# Altium PCB Altium.pcbdoc
Units mm, origin at the board's own origin, x right, y up, seen from the top; angles counter-clockwise.
Board outline 103.68 x 65.66 mm, 2 copper layers (Top Layer, Bottom Layer); 66 components, 46 nets, 313 pads, 155 vias.
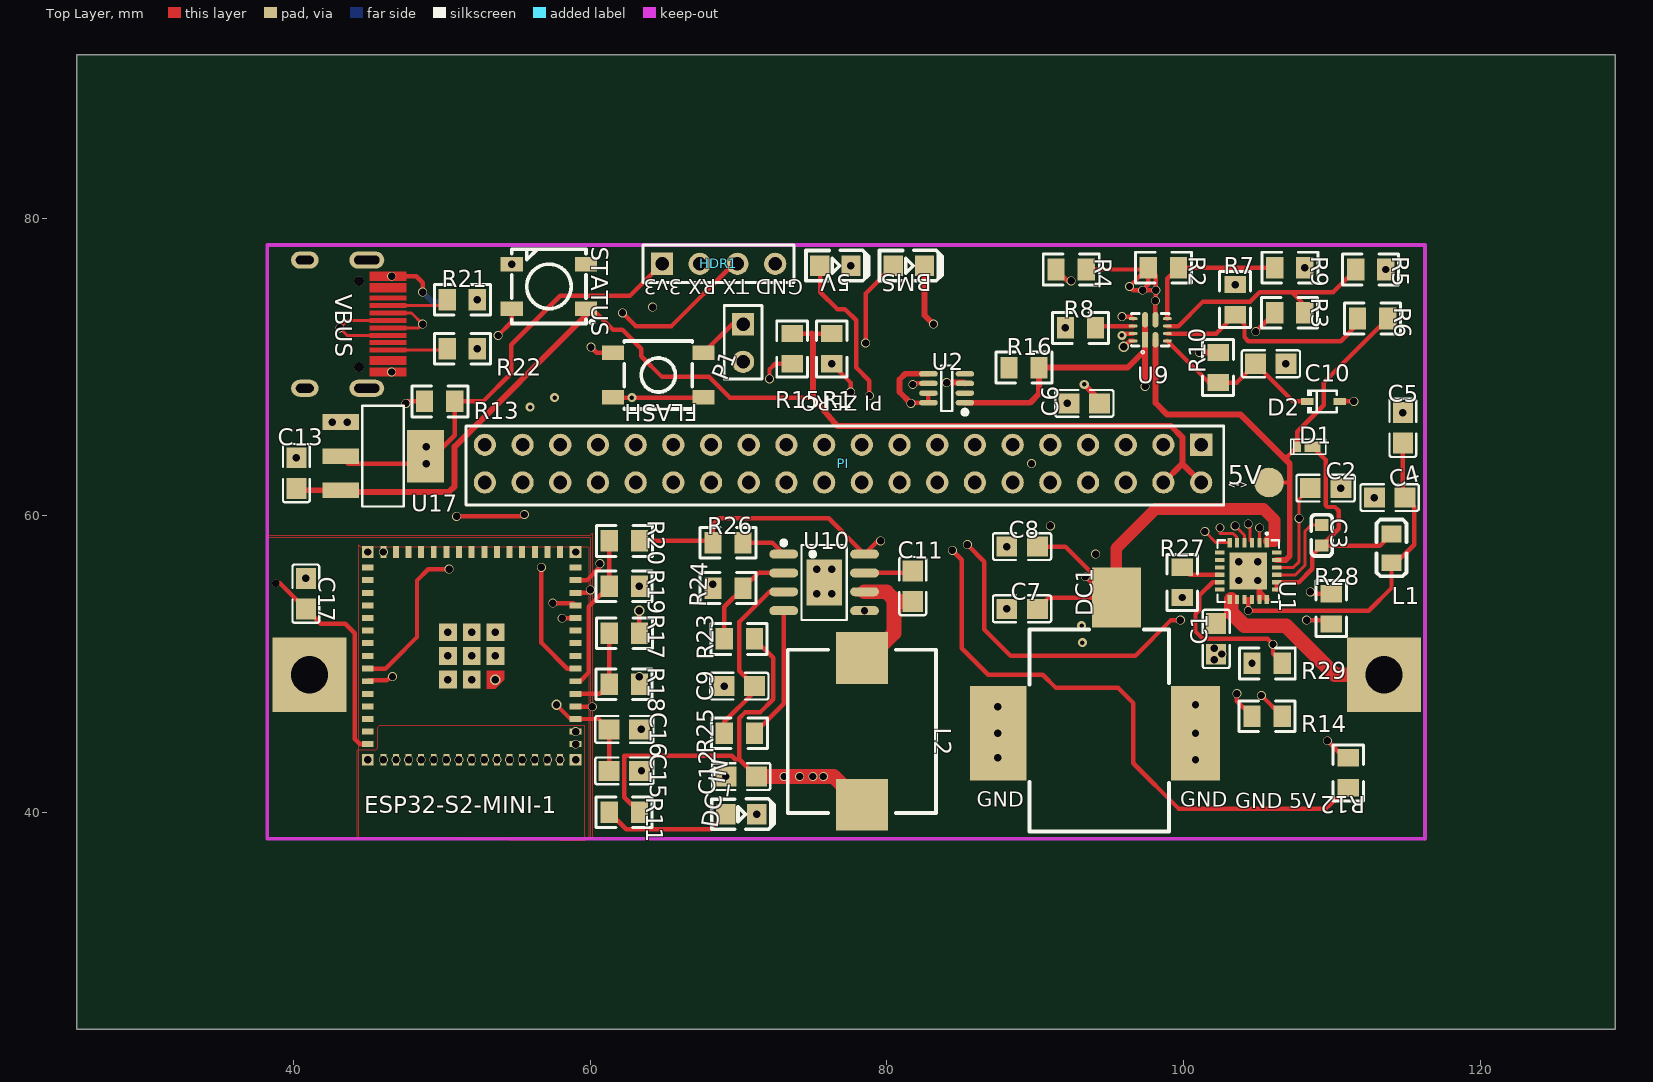
[diagram p0: Top Layer view]
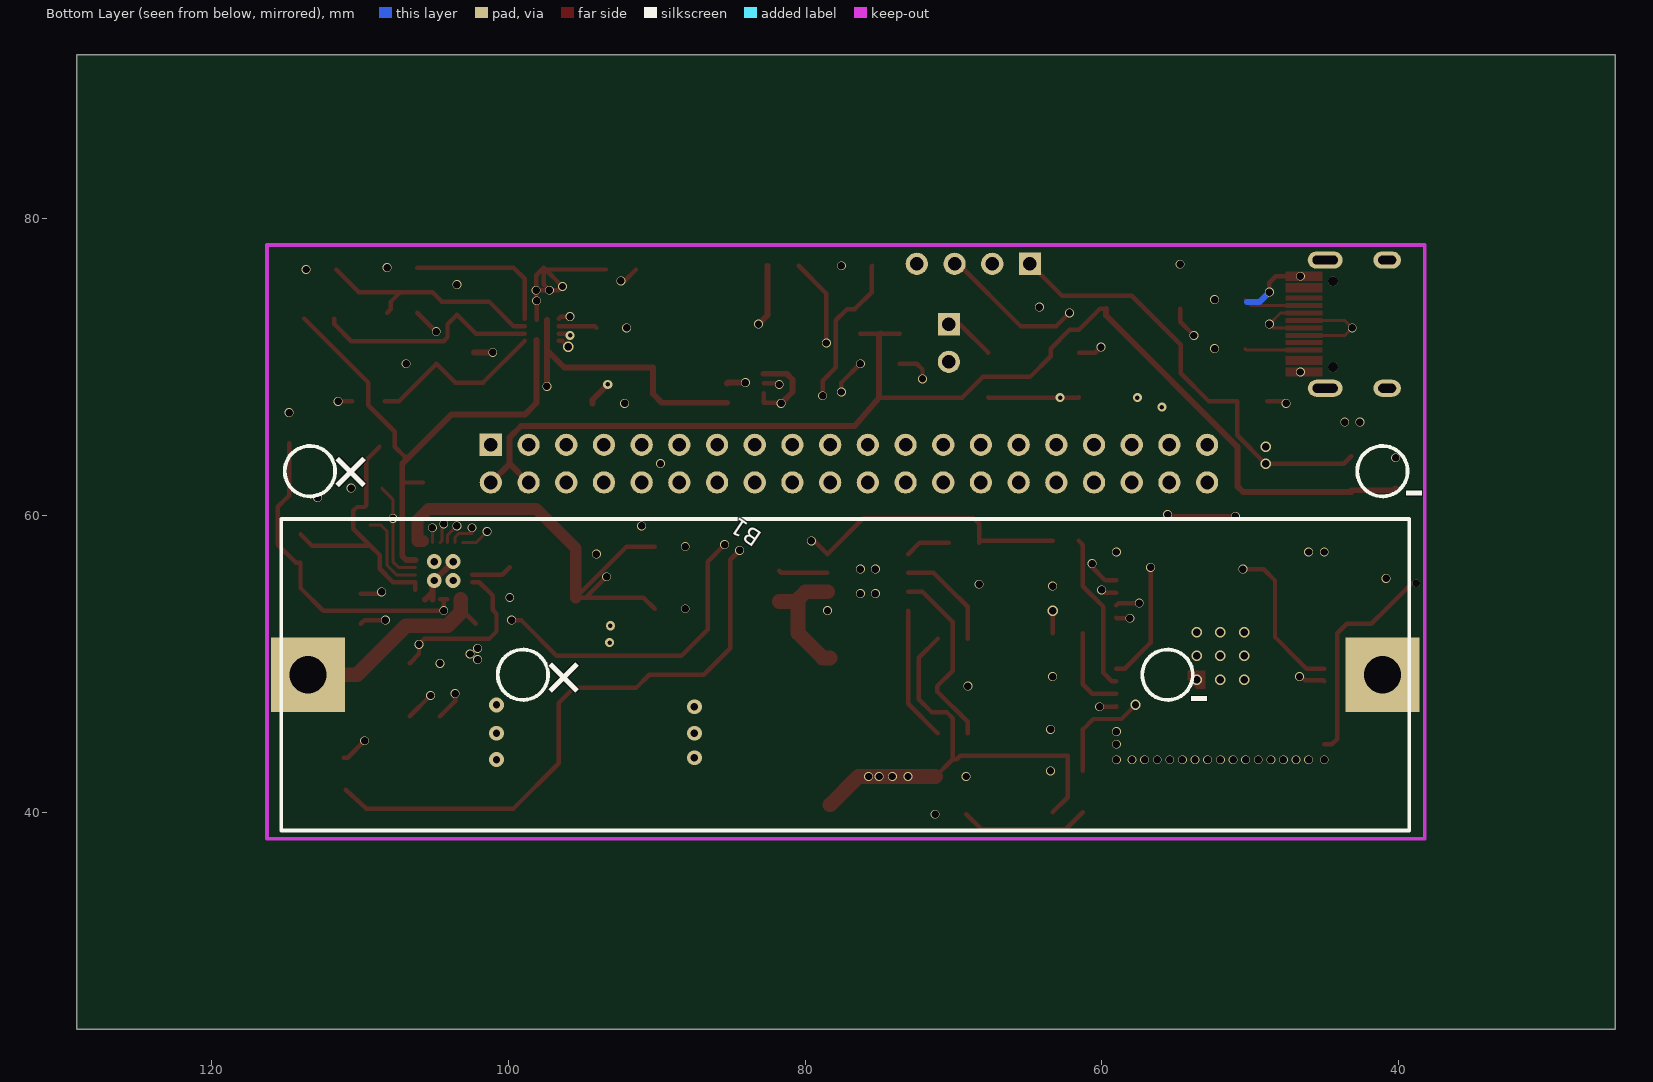
[diagram p1: Bottom Layer view, seen from below]

## Layer stack, top to bottom
Top Layer: signal copper (thickness not stored)
Dielectric: dielectric 0.32, FR-4, Dk 4.8
Bottom Layer: signal copper (thickness not stored)

## Board outline
129.078,25.4 25.4,25.4 25.4,91.059 129.078,91.059

## Components (designator, comment, footprint, x,y, rotation, side; value= is the part's Value field where it differs from the comment)
5V "5V" LED-SMD_0805-R-RD 76.529,76.835 r180 top
B1 "18650" 18650-BATT-HLDR 80.085,49.276 r270 bottom
BMS "BMS_STATUS" LED-SMD_0805-R-RD 81.482,76.835 r180 top
C1 "10uF" C0805 102.183,51.689 r90 top
C2 "4.7uF" C0805 109.549,61.849 r0 top
C3 "47nF" C0603 109.295,58.674 r90 top
C4 "10uF" C0805 113.867,61.214 r0 top
C5 "10uF" C0805 114.756,65.913 r270 top
C6 "1uF" C0805 93.293,67.564 r180 top
C7 "10uF" C0805 89.102,53.721 r0 top
C8 "10uF" C0805 89.102,57.912 r0 top
C9 "0.47uF" C0805 70.052,48.514 r0 top
C10 "0.1uF" C0805 105.866,70.231 r180 top
C11 "0.47uF" C0805 81.736,55.245 r270 top
C12 "10uF" C0805 70.179,42.418 r0 top
C13 "1uF" C0805 40.207,62.865 r90 top
C15 "22uF" C0805 62.305,42.799 r0 top
C16 "0.1uF" C0805 62.305,45.593 r0 top
C17 "0.1uF" C0805 40.842,54.737 r90 top
D1 "NSR10F20NXT5G" DSN2_L1.6-W0.8-RD 108.152,64.643 r0 top
D2 "BZT52B3V0S" SOD-323_L1.8-W1.3-LS2.5-RD 109.422,67.691 r0 top
DC1 "DC" RASM712BKZ 94.69,45.339 r0 top
DC_IN "DC_IN" LED-SMD_0805-R-RD 70.18,39.878 r180 top
ESP32-S2-MINI-1 "ESP32-S2-MINI-1" ESP32-S2-MINI-1 52.018,50.546 r180 top
FLASH "PTS647SM70SMTR2LFS" KEY-SMD_4P-L4.5-W4.5-P3.00-LS6.5-TL 64.591,69.469 r180 top
HDR1 "UART" HDR1X4 68.655,76.962 r0 top
L1 "2.2uH" L0805 113.994,57.785 r270 top
L2 "1.5uH" IND-SMD_L11.0-W10.0 78.307,45.466 r270 top
P1 "HDR1X2" HDR1X2 70.179,73.025 r270 top
PI "Raspberry PI ZERO W" PI-ZERO-HDR 77.291,63.246 r180 top
R1 "10k" 0805 76.275,71.247 r90 top
R2 "10.2k" 0805 98.627,76.708 r180 top
R3 "23.7k" 0805 107.136,73.66 r0 top
R4 "1M" 0805 92.404,76.581 r180 top
R5 "5k" 0805 112.597,76.581 r0 top
R6 "23.7k" 0805 112.724,73.279 r0 top
R7 "5k" 0805 103.453,74.549 r270 top
R8 "18k" 0805 93.039,72.644 r180 top
R9 "5k" 0805 107.136,76.708 r180 top
R10 "20k" 0805 102.31,69.977 r90 top
R11 "1k" 0805 62.305,40.005 r0 top
R12 "1k" 0805 111.073,42.672 r90 top
R13 "10k" 0805 49.859,67.691 r180 top
R14 "1k" 0805 105.612,46.482 r0 top
R15 "10k" 0805 73.608,71.247 r90 top
R16 "0.010" 0805 89.229,69.977 r0 top
R17 "10k" 0805 62.305,52.07 r180 top
R18 "10k" 0805 62.305,48.641 r0 top
R19 "10k" 0805 62.305,55.245 r0 top
R20 "10k" 0805 62.305,58.293 r180 top
R21 "5.1k" 0805 51.383,74.549 r180 top
R22 "5.1k" 0805 51.383,71.247 r180 top
R23 "22k" 0805 70.052,51.689 r0 top
R24 "3k" 0805 69.29,55.118 r180 top
R25 "100k" 0805 70.052,45.339 r180 top
R26 "10k" 0805 69.29,58.166 r180 top
R27 "260" 0805 99.897,55.499 r90 top
R28 "10k" 0805 109.93,53.721 r270 top
R29 "10k" 0805 105.612,50.038 r180 top
STATUS "WS2812B" LED-SMD_4P-L5.0-W5.0-TL 57.225,75.438 r180 top
U1 "BQ25895RTWR" QFN-24_L4.0-W4.0-P0.50-TL-EP2.7 104.342,56.261 r270 top
U2 "INA219AIDCNR" SOT-23-8_L3.0-W1.7-P0.65-LS2.8-BR 84.022,68.58 r0 top
U9 "TPS2121RUXR" VQFN-HR-12_L2.5-W2.0-P0.50-BL 97.738,72.517 r0 top
U10 "TPS56528DDAR" SOIC-8_L4.9-W3.9-P1.27-LS6.0-BL-EP 75.767,55.499 r270 top
U17 "AMS1117-3.3_C165482" SOT-223_L6.5-W3.5-P2.30-LS7.0-BR 46.049,64.008 r180 top
VBUS "USB-C" HRO-TYPE-C-31-M-12-HANDSOLDERING 38.175,72.898 r270 top

## Footprints (in the part's own frame and the unit in brackets; to place one, negate y for a bottom-side part, rotate by r counter-clockwise, add the part's x,y. Pads: shape width x height; smd on the part's side, far side on the other; paste and mask are expansions set on the pad)
0805 [mm]
  rect 1.16x1.45 smd: 1(-1.016,0) 2(1.016,0)
  silkscreen extent -1.9,-1.03 1.87,1.04
18650-BATT-HLDR [mm]
  rect 5x5 hole 2.5: +(0,-33.401) -(0,38.989)
  silkscreen extent -10.5,-35.21 10.5,40.79
C0603 [mm]
  rect 0.8x0.9 smd: 1(-0.7,0) 2(0.7,0)
  silkscreen extent -1.41,-0.71 1.39,0.72
C0805 [mm]
  rect 1.41x1.35 smd: 1(-1.03,0) 2(1.03,0)
  silkscreen extent -1.96,-0.9 1.96,0.9
DSN2_L1.6-W0.8-RD [mm]
  rect 0.52x0.7 smd: 1(-0.517,0)
  rect 1.05x0.7 smd: 2(0.517,0)
  silkscreen extent -0.93,-0.51 1.41,0.51
ESP32-S2-MINI-1 [mm]
  rect 0.8x0.4 smd: 3(-7,4.252) 4(-7,3.404) 5(-7,2.556) 6(-7,1.708) 7(-7,0.86) 8(-7,0) 9(-7,-0.86) 10(-7,-1.708) 11(-7,-2.556) 12(-7,-3.404) 13(-7,-4.252) 14(-7,-5.1) 15(-7,-5.95) 31(7,-5.95) 32(7,-5.1) 33(7,-4.252) 34(7,-3.404) 35(7,-2.556) 36(7,-1.708) 37(7,-0.86) 38(7,0) 39(7,0.86) 40(7,1.708) 41(7,2.556) 42(7,3.404) 43(7,4.252) 44(7,5.1) 45(7,5.95) GND(-7,5.95) GND(-7,5.1)
  rect 0.4x0.8 smd: 16(-5.95,-7) 17(-5.1,-7) 18(-4.252,-7) 19(-3.404,-7) 20(-2.556,-7) 21(-1.708,-7) 22(-0.86,-7) 23(0,-7) 24(0.86,-7) 25(1.708,-7) 26(2.556,-7) 27(3.404,-7) 28(4.252,-7) 29(5.1,-7) GND(-5.95,7) GND(-5.1,7) GND(-4.252,7) GND(-3.404,7) GND(-2.556,7) GND(-1.708,7) GND(-0.86,7) GND(0,7) GND(0.86,7) GND(1.708,7) GND(2.556,7) GND(3.404,7) GND(4.252,7) GND(5.1,7) GND(5.95,7) GND(5.95,-7)
  rect 0.8x0.8 smd: GND(-7,7) GND(-7,-7) GND(7,-7) GND(7,7)
  round 0 smd: GND(-1.6,1.6)
  rect 1.2x1.2 smd: GND(-1.6,0) GND(-1.6,-1.6) GND(0,1.6) GND(0,0) GND(0,-1.6) GND(1.6,1.6) GND(1.6,0) GND(1.6,-1.6)
  Top Layer region: -1,1 -2.2,1 -2.2,1.6 -1.6,2.2 -1,2.2
HDR1X2 [mil]
  rect 59x59 hole 36: 1(5,5)
  round 59 hole 36: 2(105,5)
  silkscreen extent -45,-45 150,55
HDR1X4 [mil]
  rect 59x59 hole 36: 1(-150,0)
  round 59 hole 36: 2(-50,0) 3(50,0) 4(150,0)
  silkscreen extent -200,-50 200,50
HRO-TYPE-C-31-M-12-HANDSOLDERING [mm]
  round 0 smd: A1B12(-3.225,8.195) A4B9(-2.45,8.195) A5(-1.25,8.195) A6(-0.25,8.195) A7(0.25,8.195) A8(1.25,8.195) B1A12(3.225,8.195) B4A9(2.45,8.195) B5(1.75,8.195) B6(0.75,8.195) B7(-0.75,8.195) B8(-1.75,8.195)
  oval 1.15x2.35 hole 0.6 slot 1.7 at 90 deg: SHELL(-4.32,6.78) SHELL(4.32,6.78)
  oval 1.15x1.85 hole 0.6 slot 1.2 at 90 deg: SHELL(-4.32,2.6) SHELL(4.32,2.6)
  round 0.65 hole 0.65 unplated: ""(-2.89,6.25) ""(2.89,6.25)
  Top Layer region: -0.4,9.42 -0.1,9.42 -0.1,6.97 -0.4,6.97
  Top Layer region: 0.1,9.42 0.4,9.42 0.4,6.97 0.1,6.97
  Top Layer region: 0.6,9.42 0.9,9.42 0.9,6.97 0.6,6.97
  Top Layer region: -0.9,9.42 -0.6,9.42 -0.6,6.97 -0.9,6.97
  Top Layer region: 1.1,9.42 1.4,9.42 1.4,6.97 1.1,6.97
  Top Layer region: -1.4,9.42 -1.1,9.42 -1.1,6.97 -1.4,6.97
  Top Layer region: 1.6,9.42 1.9,9.42 1.9,6.97 1.6,6.97
  Top Layer region: -1.9,9.42 -1.6,9.42 -1.6,6.97 -1.9,6.97
  Top Layer region: -2.75,9.42 -2.15,9.42 -2.15,6.97 -2.75,6.97
  Top Layer region: 2.15,9.42 2.75,9.42 2.75,6.97 2.15,6.97
  Top Layer region: -3.525,9.42 -2.925,9.42 -2.925,6.97 -3.525,6.97
  Top Layer region: 2.925,9.42 3.525,9.42 3.525,6.97 2.925,6.97
IND-SMD_L11.0-W10.0 [mm]
  rect 3.5x3.5 smd: 1(-4.95,0) 2(4.95,0)
  silkscreen extent -5.5,-5 5.5,5
KEY-SMD_4P-L4.5-W4.5-P3.00-LS6.5-TL [mm]
  rect 1.5x1 smd: 1(-3.05,1.5) 2(3.05,1.5) 3(-3.05,-1.5) 4(3.05,-1.5)
  silkscreen extent -2.29,-2.29 2.29,2.29
L0805 [mm]
  rect 1.133x1.377 smd: 1(-0.966,0) 2(0.966,0)
  silkscreen extent -1.95,-1.02 1.86,1.02
LED-SMD_4P-L5.0-W5.0-TL [mm]
  rect 1.5x1 smd: 1(-2.5,1.5) 2(-2.5,-1.5) 3(2.5,-1.5) 4(2.5,1.5)
  silkscreen extent -3,-2.5 2.5,2.5
LED-SMD_0805-R-RD [mm]
  rect 1.3x1.4 smd: 1(1.05,0) 2(-1.05,0)
  silkscreen extent -2.22,-1.04 1.99,1.01
PI-ZERO-HDR [mil]
  rect 59x59 hole 36: 1(-940,-60)
  round 59 hole 36: 2(-940,40) 3(-840,-60) 4(-840,40) 5(-740,-60) 6(-740,40) 7(-640,-60) 8(-640,40) 9(-540,-60) 10(-540,40) 11(-440,-60) 12(-440,40) 13(-340,-60) 14(-340,40) 15(-240,-60) 16(-240,40) 17(-140,-60) 18(-140,40) 19(-40,-60) 20(-40,40) 21(60,-60) 22(60,40) 23(160,-60) 24(160,40) 25(260,-60) 26(260,40) 27(360,-60) 28(360,40) 29(460,-60) 30(460,40) 31(560,-60) 32(560,40) 33(660,-60) 34(660,40) 35(760,-60) 36(760,40) 37(860,-60) 38(860,40) 39(960,-60) 40(960,40)
  silkscreen extent -1000,-110 1010,100
QFN-24_L4.0-W4.0-P0.50-TL-EP2.7 [mm]
  rect 0.633x0.28 smd: 1(-1.912,1.25) 2(-1.912,0.75) 3(-1.912,0.25) 4(-1.912,-0.25) 5(-1.912,-0.75) 6(-1.912,-1.25) 13(1.912,-1.25) 14(1.912,-0.75) 15(1.912,-0.25) 16(1.912,0.25) 17(1.912,0.75) 18(1.912,1.25)
  rect 0.28x0.633 smd: 7(-1.25,-1.912) 8(-0.75,-1.912) 9(-0.25,-1.912) 10(0.25,-1.912) 11(0.75,-1.912) 12(1.25,-1.912) 19(1.25,1.912) 20(0.75,1.912) 21(0.25,1.912) 22(-0.25,1.912) 23(-0.75,1.912) 24(-1.25,1.912)
  rect 2.5x2.5 smd: 25(0,0)
  silkscreen extent -2.6,-2.08 2.08,2.08
RASM712BKZ [mm]
  rect 3.3x4.06 smd: 1(0.76,9.14)
  rect 3.3x6.35 smd: 2(6.1,0)
  rect 3.81x6.35 smd: 3(-7.19,0)
  silkscreen extent -5.08,-6.63 4.32,6.98
SOD-323_L1.8-W1.3-LS2.5-RD [mm]
  rect 0.845x0.455 smd: 1(-1.098,0) 2(1.098,0)
  silkscreen extent -1.1,-0.8 0.88,0.8
SOIC-8_L4.9-W3.9-P1.27-LS6.0-BL-EP [mm]
  oval 0.602x1.941 smd: 1(-1.905,-2.72) 2(-0.635,-2.72) 3(0.635,-2.72) 4(1.905,-2.72) 5(1.905,2.72) 6(0.635,2.72) 7(-0.635,2.72) 8(-1.905,2.72)
  rect 3.098x2.41 smd: 9(0,0)
  silkscreen extent -2.81,-2.87 2.53,1.52
SOT-23-8_L3.0-W1.7-P0.65-LS2.8-BR [mm]
  oval 1.252x0.364 smd: 1(1.226,-0.975) 2(1.226,-0.325) 3(1.226,0.325) 4(1.226,0.975) 5(-1.226,0.975) 6(-1.226,0.325) 7(-1.226,-0.325) 8(-1.226,-0.975)
  silkscreen extent -0.37,-1.76 1.38,1.53
SOT-223_L6.5-W3.5-P2.30-LS7.0-BR [mm]
  rect 2.465x1.05 smd: 1(2.858,-2.3) 2(2.857,0) 3(2.857,2.3)
  rect 2.465x3.54 smd: 4(-2.857,0)
  silkscreen extent -1.4,-3.4 1.4,3.4
VQFN-HR-12_L2.5-W2.0-P0.50-BL [mm]
  rect 0.4x1.05 smd: 1(-0.35,-0.675)
  oval 0.4x1.05 smd: 2(0.35,-0.675) 7(0.35,0.675) 8(-0.35,0.675)
  oval 0.6x0.2 smd: 3(1.15,-0.75) 4(1.15,-0.25) 5(1.15,0.25) 6(1.15,0.75) 9(-1.15,0.75) 10(-1.15,0.25) 11(-1.15,-0.25) 12(-1.15,-0.75)
  silkscreen extent -1.25,-1.6 1.25,1.1

## Free pads (board coordinates)
  round 2 smd: 1(105.739,62.23)

## Via types
v1: diameter 0.6, hole 0.5, Top Layer to Bottom Layer, 123 vias
v2: diameter 0.7, hole 0.5, Top Layer to Bottom Layer, 14 vias
v3: diameter 1, hole 0.5, Top Layer to Bottom Layer, 10 vias
v4: diameter 0.61, hole 0.305, Top Layer to Bottom Layer, 7 vias
v5: diameter 0.5, hole 0.5, Top Layer to Bottom Layer, 1 vias

## Nets (pads, with @x,y where several pads share a name; then routed paths per layer and width w, separated by ;. In a path a pad name is that pad's centre, name@x,y a point inside that pad or via, vN(x,y) a via of type N, cw(c..) or ccw(c..) an arc to the next point about the centre after c; other vN are vias at no path point)
3V: C10.2 D2.1 R10.1 U9.3 | length 12.2
  Top Layer w0.3: U9.3 101.694,68.961 R10.1 103.566,68.961 C10.2 107.376,67.691 D2.1
3V3: C15.1 C16.1 ESP32-S2-MINI-1.3 HDR1.1 R13.1 U17.2 U17.4 | length 59.2
  Top Layer w0.3: U17.2 43.7,63.5 v2(48.97,63.5) 50.875,65.405 R13.1 52.78,67.691 54.685,69.596 54.685,71.501 57.987,74.803 62.686,74.803 HDR1.1 ; v2(57.733,47.244) 58.683,46.294 ESP32-S2-MINI-1.3 60.574,46.294 C16.1 C15.1
  Mid-Layer 1 w0.3: v2(48.97,63.5) v2(48.97,64.643)
  Mid-Layer 2 w0.3: v2(48.97,63.5) 55.574,56.896 55.574,47.244 v2(57.733,47.244)
+5V: C13.1 PI.2 PI.4 R1.2 R12.2 R15.2 R16.1 STATUS.1 U2.2 U2.4 U17.3 | length 109.9
  Top Layer w0.3: STATUS.1 60.121,73.937 61.543,72.517 62.178,72.517 63.448,71.247 63.448,70.739 64.845,69.342 68.02,69.342 69.417,67.945 75.005,67.945 ; R15.2 R1.2 ; v1(109.676,44.831) 110.819,43.688 R12.2
  Top Layer w0.4: C13.1 40.334,61.708 U17.3 ; U17.3@43.192,61.709 43.192,61.595 50.494,61.595 50.875,61.976 50.875,64.643 59.724,73.492 STATUS.1 ; 74.928,72.263 75.005,72.186 75.005,67.945 ; 75.005,68.58 75.005,67.945 ; 86.943,66.04 87.959,66.04 99.135,66.04 99.897,65.278 99.897,63.5 ; 87.756,66.04 87.324,66.04 86.933,66.04 81.863,66.04 76.656,66.04 75.005,67.945 ; PI.4 99.897,63.5 ; PI.2 99.897,63.5
  Mid-Layer 1 w0.3: PI.2 103.072,60.325 105.485,60.325 106.501,59.309 106.501,54.102 107.009,53.594 107.263,53.594 108.914,53.594 108.914,51.689 109.676,50.927 v1(109.676,44.831)
BAT_VSENSE: B1.+ C1.2 R17.1 U1.13 U1.14 | length 79.7
  Top Layer w0.3: R17.1 v2(63.321,53.594) ; C1.2 103.199,53.735 U1.13@103.199,54.356
  Top Layer w1: U1.13@103.199,54.356 103.199,53.467 104.088,52.578 106.882,52.578 110.184,49.276 B1.+
  Mid-Layer 1 w0.3: v2(63.321,53.594) 66.369,50.546 66.369,47.498 72.211,41.656 105.231,41.656 111.2,41.656 112.089,42.545 112.089,44.577 113.486,45.974 B1.+
BAT_VSENSE_DIV: ESP32-S2-MINI-1.5 R17.2 R18.1 | length 6
  Top Layer w0.3: ESP32-S2-MINI-1.5 60.638,47.99 R18.1 R17.2
BMS_2: BMS.2 R14.1 | length 41.3
  Top Layer w0.3: v1(103.58,48.006) 103.58,47.498 R14.1
  Top Layer w0.4: BMS.2 82.532,73.499 v1(83.133,72.898)
  Mid-Layer 1 w0.4: v1(83.133,72.898) 83.133,72.39 89.737,65.786 v1(89.737,63.5) ; v1(91.007,59.309) 92.15,59.309 v1(94.055,57.404)
  Mid-Layer 2 w0.3: v1(94.055,57.404) 94.055,55.753 101.802,48.006 v1(103.58,48.006)
  Mid-Layer 2 w0.4: v1(89.737,63.5) 89.737,60.579 90.118,60.198 ; 90.118,60.325 90.118,60.198 ; v1(91.007,59.309) 90.118,60.198
BUCKOUT: C12.2 L2.2 R2.2 R3.1 R4.1 R11.2 R23.2 U9.7 | length 114.3
  Top Layer w0.3: R11.2 62.305,41.021 62.305,43.815 69.544,43.815 69.785,43.574 70.052,43.574 70.052,46.355 70.433,46.736 71.449,46.736 72.338,47.625 72.338,50.419 R23.2 ; 70.052,43.575 C12.2 ; R4.1 97.484,76.581 R2.2 ; U9.7 v1(98.088,74.472) 98.119,74.503 v1(98.119,75.184) ; v1(104.85,72.39) R3.1 ; v1(97.23,75.184) v1(98.119,75.184) ; v1(97.23,75.184) 96.595,75.184 v1(96.341,75.438) R2.2 ; v1(97.23,75.184) 97.611,75.565 R2.2 ; R2.2 98.119,76.2 v1(98.119,75.184)
  Top Layer w1: C12.2 v1(73.062,42.418) v1(74.116,42.418) v1(75.005,42.418) v1(75.715,42.418) 76.405,42.418 L2.2
  Mid-Layer 1 w0.3: 96.849,70.358 97.103,70.358 98.119,69.342 101.167,72.39 v1(104.85,72.39) ; v1(98.088,74.472) 98.119,74.503 v1(98.119,75.184)
  Mid-Layer 1 w0.6: v1(73.062,42.418) v1(75.715,42.418) 73.481,44.652 73.481,57.658 76.021,60.198 90.814,60.198 91.642,60.198 92.277,60.833 92.277,66.04 94.944,68.707 96.849,70.358 96.849,73.233 v1@98.089,74.473 ; v1(96.341,75.438) 96.595,75.184 v1(98.119,75.184)
D+: U1.2 VBUS.A6 VBUS.B6 | length 81
  Top Layer w0.2: VBUS.B6 43.624,72.148 v1(43.128,72.644) 43.632,73.148 VBUS.A6 ; U1.2 105.092,59.17 v1(105.104,59.182)
  Mid-Layer 2 w0.3: v1(43.128,72.644) 47.192,72.644 49.732,75.184 94.944,75.184 105.104,65.024 v1(105.104,59.182)
D-: U1.3 VBUS.A7 VBUS.B7 | length 74.1
  Top Layer w0.2: VBUS.B7 47.967,73.647 v1(48.716,72.898) 48.466,72.648 VBUS.A7 ; v1(104.342,59.436) 104.469,59.436 104.469,58.295 U1.3
  Mid-Layer 2 w0.3: v1(48.716,72.898) 61.543,72.898 62.813,71.628 70.941,71.628 72.719,69.85 74.497,69.85 77.164,72.517 77.418,72.771 ; 77.291,72.644 77.418,72.771 ; v1(104.342,59.436) 104.342,64.77 98.627,70.485 91.515,70.485 88.467,73.533 78.18,73.533 77.418,72.771
DC_IN: C7.2 C8.2 DC1.1 R20.1 R26.2 U1.1 U10.8 | length 66.1
  Top Layer w0.3: R20.1 68.147,58.293 R26.2 68.274,59.436 68.655,59.817 76.075,59.817 U10.8 79.377,58.293 v1(79.577,58.293) ; C7.2 90.89,54.479 DC1.1 ; C8.2 92.017,57.912 DC1.1 ; v1(93.372,55.88) 94.773,54.479 DC1.1
  Top Layer w0.8: DC1.1 95.452,57.785 98.119,60.452 105.358,60.452 106.12,59.69 106.12,58.293 105.739,58.293
  Mid-Layer 1 w0.3: v1(79.577,58.293) 81.863,58.293 84.276,55.88 v1(93.372,55.88)
DC_IN_DIV: ESP32-S2-MINI-1.6 R19.1 R20.2 | length 10.7
  Top Layer w0.3: ESP32-S2-MINI-1.6@59.018,48.837 59.326,48.837 59.892,49.403 59.892,53.848 R19.1 61.289,58.039 R20.2@61.543,58.293
ESP32-S2-MINI-1_39: ESP32-S2-MINI-1.39 HDR1.3 | length 44.8
  Top Layer w0.3: ESP32-S2-MINI-1.39@45.018,49.686 46.205,49.686 46.811,50.292 48.335,51.816 48.335,55.626 49.097,56.388 v1(50.494,56.388) ; v1(62.178,73.66) 63.067,72.771 65.48,72.771 69.671,76.962 HDR1.3
  Mid-Layer 1 w0.3: v1(50.494,56.388) 54.177,60.071 54.177,65.024 54.177,66.675 55.955,68.453 57.606,70.104 57.606,73.152 58.114,73.66 v1(62.178,73.66)
ESP32-S2-MINI-1_40: ESP32-S2-MINI-1.40 HDR1.2 | length 40.9
  Top Layer w0.3: ESP32-S2-MINI-1.40 45.075,48.895 46.303,48.895 46.557,49.149 v1(46.684,49.149) ; v1(51.002,59.944) 55.447,59.944 v1(55.574,60.071)
  Mid-Layer 1 w0.3: v1(46.684,49.149) 46.684,55.626 v1(51.002,59.944) ; v1@55.574,59.944 v1(55.574,60.071) 56.59,61.087 56.59,65.278 67.385,76.073 HDR1.2
ESP32-S2-MINI-1_45: C17.1 ESP32-S2-MINI-1.45 FLASH.1 FLASH.2 R13.2 | length 58
  Top Layer w0.3: v5(38.81,55.431) 39.117,55.43 C17.1@40.842,53.708 ; C17.1 41.844,52.705 43.509,52.705 44.144,52.07 44.144,44.947 44.504,44.587 ; 44.505,44.587 ESP32-S2-MINI-1.45@45.018,44.595 ; v1(47.588,67.564) 47.715,67.691 R13.2 ; FLASH.2 61.565,67.945 v4(62.813,67.945) 67.617,67.945 FLASH.1
  Mid-Layer 1 w0.3: v4(55.955,67.31) 56.971,67.31 v4(57.606,67.945)
  Mid-Layer 2 w0.3: v5(38.81,55.431) 38.81,64.389 38.937,64.516 38.937,65.151 40.969,67.183 45.16,67.183 45.414,67.437 47.461,67.437 v1(47.588,67.564) ; v1(47.588,67.564) 55.701,67.564 v4(55.955,67.31) ; v4(57.606,67.945) 59.13,67.945 60.019,67.056 61.924,67.056 v4(62.813,67.945)
GND: 5V.2 B1.- C1.1 C2.2 C4.1 C5.1 C6.2 C7.1 C8.1 C9.1 C10.1 C12.1 C13.2 C15.2 C16.2 C17.2 D2.2 DC1.2 DC1.3 DC_IN.2 ESP32-S2-MINI-1.GND FLASH.3 FLASH.4 HDR1.4 P1.1 PI.6 PI.9 PI.14 PI.20 PI.25 PI.30 PI.34 PI.39 R5.2 R7.1 R8.2 R9.1 R18.2 R19.2 R21.1 R22.1 R24.2 R27.1 R29.2 STATUS.3 U1.17 U1.18 U1.25 U2.3 U9.12 U10.5 U10.9 U17.1 VBUS.A1B12 VBUS.B1A12 | length 16.9
  Top Layer w0.3: VBUS.A1B12 48.285,76.123 48.716,75.692 v1(48.716,75.057) ; v1(60.059,71.35) 60.44,70.969 FLASH.4 ; FLASH.3 69.57,72.898 P1.1 ; v2(95.96,71.374) 96.353,71.767 U9.12 ; D2.2 v1(111.454,67.691)
  Top Layer w0.4: v1(84.022,68.961) 85.192,68.961 U2.3 ; v3(103.707,56.896) v3(104.977,55.626) 105.092,55.511 U1.17 ; 105.092,54.877 105.092,54.849 U1.18
  Bottom Layer w0.4: v1(48.716,75.057) 49.391,74.382 50.225,74.382
  other v1: 71.229,39.878 69.149,42.418 63.462,42.799 45.018,43.546 46.068,43.546 46.918,43.546 47.766,43.546 48.614,43.546 49.462,43.546 50.31,43.546 51.158,43.546 52.018,43.546 52.878,43.546 53.726,43.546 54.574,43.546 55.422,43.546 56.27,43.546 57.118,43.546 57.968,43.546 59.018,43.546 59.018,44.596 59.018,45.446 63.448,45.593 69.022,48.514 63.321,49.149 104.596,50.038 102.056,50.292 102.564,50.673 102.056,51.054 78.488,53.594 88.072,53.721 99.897,54.483 75.259,54.737 76.275,54.737 63.321,55.245 68.274,55.372 40.842,55.767 75.259,56.388 76.275,56.388 45.018,57.546 46.068,57.546 59.018,57.546 88.072,57.912 112.837,61.214 110.579,61.849 40.207,63.895 42.62,66.294 43.636,66.294 114.756,66.943 92.15,67.564 46.624,69.673 106.882,70.231 52.399,71.247 92.023,72.644 64.21,74.041 52.399,74.549 103.453,75.565 46.624,76.123 113.613,76.581 108.152,76.708 77.545,76.835 54.725,76.938
  other v2: 50.418,48.946 52.018,48.946 53.618,48.946 50.418,50.546 52.018,50.546 53.618,50.546 50.418,52.146 52.018,52.146 53.618,52.146
  other v3: 100.786,43.561 87.451,43.688 87.451,45.339 100.79,45.339 87.451,47.117 100.786,47.244 103.707,55.626 104.977,56.896
IO0: ESP32-S2-MINI-1.4 P1.2 | length 29.8
  Top Layer w0.3: ESP32-S2-MINI-1.4 59.043,47.117 v1(60.146,47.117)
  Mid-Layer 1 w0.3: v1(60.146,47.117) 62.305,49.276 62.305,60.325 62.813,60.833 63.702,60.833 64.337,61.468 64.337,65.532 69.163,70.358 P1.2
OV2: R6.1 R7.2 U9.4 | length 15.5
  Top Layer w0.3: U9.4 102.187,72.267 R7.2 104.088,72.898 104.088,72.009 104.342,71.755 110.565,71.755 111.708,72.898 R6.1
PMID: D1.1 pad.1 R6.2 U1.23 U9.2 | length 36
  Top Layer w0.3: pad.1 107.136,62.243 ; 106.979,63.657 106.979,63.988 D1.1 ; D1.1 107.634,65.649 109.422,67.437 109.422,67.691 109.422,68.961 R6.2
  Top Layer w0.4: U9.2@98.089,71.841 98.089,67.594 98.881,66.802 103.834,66.802 107.136,63.5 107.136,61.341 107.136,57.277 106.869,57.01 U1.23@106.255,57.01
PMX_OUT: R10.2 R16.2 U2.1 U9.1 U9.8 | length 26.8
  Top Layer w0.4: U2.1@85.249,67.605 89.651,67.605 90.245,68.199 R16.2 96.214,69.977 97.388,71.151 U9.1 ; v1(97.388,68.707) U9.1 ; U9.8 U9.1 ; v1(101.04,70.993) R10.2
  Mid-Layer 1 w0.4: v1(97.388,68.707) 100.532,68.707 101.04,69.088 v1(101.04,70.993)
PR1: R2.1 R9.2 U9.6 | length 10.2
  Top Layer w0.3: U9.6 98.888,75.953 R2.1 R9.2
R11_1: DC_IN.1 R11.1 | length 8.7
  Top Layer w0.3: R11.1 62.432,38.862 68.113,38.862 DC_IN.1@69.129,39.878
R12_1: 5V.1 R12.1 | length 65.1
  Top Layer w0.3: 5V.1@75.48,76.835 75.513,76.799 75.513,75.057 76.656,73.914 77.164,73.914 77.926,73.152 77.926,69.977 78.815,69.088 v1(78.815,68.072) ; v1(84.403,57.658) 85.038,57.023 85.038,51.054 86.816,49.276 90.499,49.276 91.388,48.387 95.579,48.387 96.595,47.371 96.595,43.307 99.643,40.259 109.549,40.259 R12.1@110.946,41.529
  Mid-Layer 2 w0.3: v1(78.815,68.072) 79.704,67.183 79.704,59.182 81.228,57.658 v1(84.403,57.658)
REGN: C2.1 R28.1 U1.22 | length 13.7
  Top Layer w0.2: U1.22@106.255,56.51 106.953,56.515 107.39,56.515 107.771,56.896 v1(107.771,59.817) 107.771,61.102 C2.1
  Top Layer w0.3: v1(108.533,54.864) 108.66,54.737 R28.1
  Mid-Layer 1 w0.3: v1(107.771,59.817) 108.533,59.055 v1(108.533,54.864)
RGB_D: ESP32-S2-MINI-1.7 STATUS.4 | length 27.1
  Top Layer w0.3: v1(53.796,72.136) 54.725,73.065 STATUS.4@54.725,73.938 ; v1(56.717,56.515) 56.717,51.435 58.466,49.686 ESP32-S2-MINI-1.7@59.018,49.686
  Mid-Layer 2 w0.3: v1(53.796,72.136) 53.796,70.358 56.717,67.437 v1(56.717,56.515)
SCL: ESP32-S2-MINI-1.11 R1.1 U1.5 U2.5 U2.7 U2.8 | length 96.5
  Top Layer w0.2: v1(102.437,59.182) 102.437,58.801 103.326,58.801 103.592,58.535 U1.5
  Top Layer w0.3: v1(58.114,53.086) 59.002,53.086 ESP32-S2-MINI-1.11 ; v1(76.275,70.231) 77.545,68.961 v1(77.545,68.326) ; v1(81.609,67.564) 81.65,67.605 U2.8 U2.7
  Top Layer w0.4: v1(81.609,67.564) 80.847,68.326 80.847,69.174 81.228,69.555 U2.5
  Mid-Layer 1 w0.3: v1(77.545,68.326) 78.561,67.31 81.609,67.31 v1(81.609,67.564) ; v4(93.112,52.578) 94.182,52.578 99.389,57.785 99.389,59.055 100.532,60.198 101.802,60.198 102.437,59.563 v1(102.437,59.182)
  Mid-Layer 2 w0.3: v1(77.545,68.326) 75.767,68.326 74.624,67.183 68.274,67.183 67.385,66.294 66.877,65.786 66.877,61.214 64.845,59.182 59.003,59.182 58.368,58.547 58.368,56.642 58.368,53.34 v1(58.114,53.086) 58.622,52.578 v4(93.112,52.578)
SCL_PI: ESP32-S2-MINI-1.13 PI.5 | length 44.5
  Top Layer w0.3: ESP32-S2-MINI-1.13 59.826,54.798 v1(60.019,54.991)
  Mid-Layer 2 w0.4: v1(60.019,54.991) 60.019,55.372 60.019,57.277 60.273,57.531 76.275,57.531 76.91,56.896 90.626,56.896 93.293,59.563 94.944,61.214 94.944,63.627 PI.5
SDA: ESP32-S2-MINI-1.12 R15.1 U1.6 U2.6 | length 94.8
  Top Layer w0.2: v1(101.421,58.928) 102.176,58.173 U1.6
  Top Layer w0.3: v1(57.479,54.102) 58.866,54.102 ESP32-S2-MINI-1.12 ; v1(72.084,69.215) 72.084,69.85 72.465,70.231 R15.1 ; v1(81.736,68.834) 81.807,68.905 U2.6
  Mid-Layer 1 w0.3: v1(72.084,69.215) 81.736,69.215 v1(81.736,68.834) ; v4(93.166,51.435) 94.817,51.435 100.151,56.769 100.151,57.658 v1(101.421,58.928)
  Mid-Layer 2 w0.3: v1(72.084,69.215) 72.084,69.088 70.687,67.691 64.21,67.691 61.797,65.278 61.797,62.865 61.797,61.722 61.797,61.341 60.908,60.452 58.241,60.452 57.733,59.944 57.733,58.039 57.479,57.785 v1(57.479,54.102) 56.844,53.467 56.844,52.07 58.114,50.8 92.531,50.8 v4(93.166,51.435)
SDA_PI: ESP32-S2-MINI-1.14 PI.3 | length 45.7
  Top Layer w0.3: ESP32-S2-MINI-1.14@59.018,55.646 59.785,55.646 60.654,56.515 v1(60.654,56.769)
  Mid-Layer 2 w0.3: v1(60.654,56.769) 69.036,56.769 70.306,55.499 90.448,55.499 91.261,56.261 95.96,60.96 96.722,60.96 97.357,61.595 97.357,63.5 PI.3
SYS: BMS.1 C4.2 C5.2 L1.2 U1.15 U1.16 | length 73.1
  Top Layer w0.3: v1(78.561,71.628) 78.561,74.964 BMS.1 ; v1(85.419,58.039) 86.562,56.896 86.562,52.324 88.34,50.546 96.722,50.546 99.135,52.959 v1(99.77,52.959) ; U1.15 U1.16@104.588,54.349 ; 104.298,54.349 104.342,54.305 v1(104.342,53.594) 112.47,53.594 113.994,55.118 L1.2 114.299,56.82 115.518,58.039 115.518,60.592 C4.2@114.898,61.214 ; C5.2 114.756,61.355 C4.2
  Mid-Layer 2 w0.3: v1(78.561,71.628) 78.561,69.342 82.117,65.786 82.117,64.135 ; 83.26,63.5 82.752,63.5 ; v1(85.419,58.039) 84.53,58.928 84.53,63.246 84.276,63.5 82.752,63.5 ; v1(99.77,52.959) 100.405,53.594 v1(104.342,53.594) ; 82.117,64.135 82.752,63.5 ; 82.117,64.135 82.752,63.5
U1_4: R14.2 U1.4 | length 17.6
  Top Layer w0.2: v1(103.453,59.309) 104.092,58.67 U1.4
  Top Layer w0.3: v1@105.231,48.006 v1(105.231,47.879) R14.2
  Mid-Layer 1 w0.3: v1(103.453,59.309) 101.802,57.658 101.802,54.864 103.199,53.467 103.199,49.022 103.453,48.768 104.342,48.768 v1(105.231,47.879)
U1_10: R27.2 U1.10 | length 2.7
  Top Layer w0.3: R27.2 100.405,56.007 102.429,56.007 U1.10
U1_11: R28.2 R29.1 U1.11 | length 16.1
  Top Layer w0.3: U1.11 101.942,55.512 101.04,54.61 101.04,53.975 101.04,53.647 100.786,53.393 100.786,52.705 100.786,52.197 101.294,51.689 102.183,51.689 105.646,51.689 v1(106.01,51.325) 106.01,50.69 R29.1 ; v1(108.279,52.959) 109.676,52.959 R28.2
  Mid-Layer 1 w0.3: v1(106.01,51.325) 107.644,52.959 v1(108.279,52.959)
U1_19: C3.1 D1.2 L1.1 U1.19 U1.20 | length 18.3
  Top Layer w0.3: U1.19 U1.20 ; U1.20@106.255,55.512 107.758,55.512 108.66,56.411 108.66,57.338 C3.1 ; D1.2 109.549,63.763 109.549,60.706 109.676,60.579 110.184,60.579 110.438,60.325 110.438,59.117 C3.1 113.217,57.974 L1.1
U1_21: C3.2 U1.21 | length 5.8
  Top Layer w0.2: U1.21@106.255,56.012 107.522,56.012 108.152,56.642 108.152,58.928 108.599,59.375 C3.2
U9_5: R3.2 R5.1 U9.5 | length 16
  Top Layer w0.3: U9.5 99.639,72.767 101.294,74.422 104.469,74.422 105.104,75.057 108.025,75.057 110.057,75.057 R5.1 ; 107.263,75.057 107.355,74.965 107.898,74.422 107.898,73.914 R3.2
U9_9: R4.2 U9.9 | length 6.6
  Top Layer w0.3: R4.2 92.15,75.819 v1(92.404,75.819) ; v1(95.833,73.406) 96.448,73.406 U9.9
  Mid-Layer 1 w0.3: v1(92.404,75.819) 94.817,73.406 v1(95.833,73.406)
U9_10: R8.1 U9.10 | length 2.6
  Top Layer w0.3: R8.1@94.051,72.64 94.174,72.763 U9.10@96.584,72.763
U9_11: C6.1 U9.11 | length 8.1
  Top Layer w0.3: v4(95.833,72.136) 96.087,72.263 U9.11
  Top Layer w0.4: v4(93.293,68.834) 94.323,67.804 C6.1
  Mid-Layer 1 w0.3: v4(93.293,68.834) 95.325,70.866 95.325,71.628 ; 95.325,71.12 95.325,71.628 ; 95.325,71.628 v4(95.833,72.136) 95.325,71.628
U10_1: R26.1 U10.1 | length 3.1
  Top Layer w0.3: R26.1 72.284,58.166 U10.1
U10_2: R23.1 R24.1 U10.2 | length 7.1
  Top Layer w0.3: R23.1 69.036,53.848 R24.1 71.322,56.134 U10.2
U10_3: C9.2 R25.2 U10.3 | length 12.6
  Top Layer w0.3: R25.2 69.036,46.101 71.083,48.146 71.083,48.514 70.052,49.545 70.052,52.832 72.084,54.864 U10.3@73.047,54.864
U10_4: R25.1 U10.4 | length 9.1
  Top Layer w0.3: R25.1 73.046,47.317 U10.4
U10_6: C11.2 L2.1 U10.6 | length 9.5
  Top Layer w0.3: C11.2@81.609,54.216 81.61,54.215 C11.2
  Top Layer w1: L2.1 78.812,50.416 80.466,52.07 80.466,54.356 79.958,54.864 ; U10.6 79.958,54.864 ; C11.2 80.607,54.215 79.958,54.864
U10_7: C11.1 U10.7 | length 3.3
  Top Layer w0.3: U10.7 81.595,56.134 C11.1
VBUS_A5: R21.2 VBUS.A5 | length 4.2
  Top Layer w0.2: VBUS.A5 49.966,74.148 R21.2
VBUS_B5: R22.2 VBUS.B5 | length 4
  Top Layer w0.2: VBUS.B5 50.268,71.148 R22.2
pads on no net: ESP32-S2-MINI-1.8 ESP32-S2-MINI-1.9 ESP32-S2-MINI-1.10 ESP32-S2-MINI-1.15 ESP32-S2-MINI-1.16 ESP32-S2-MINI-1.17 ESP32-S2-MINI-1.18 ESP32-S2-MINI-1.19 ESP32-S2-MINI-1.20 ESP32-S2-MINI-1.21 ESP32-S2-MINI-1.22 ESP32-S2-MINI-1.23 ESP32-S2-MINI-1.24 ESP32-S2-MINI-1.25 ESP32-S2-MINI-1.26 ESP32-S2-MINI-1.27 ESP32-S2-MINI-1.28 ESP32-S2-MINI-1.29 ESP32-S2-MINI-1.31 ESP32-S2-MINI-1.32 ESP32-S2-MINI-1.33 ESP32-S2-MINI-1.34 ESP32-S2-MINI-1.35 ESP32-S2-MINI-1.36 ESP32-S2-MINI-1.37 ESP32-S2-MINI-1.38 ESP32-S2-MINI-1.41 ESP32-S2-MINI-1.42 ESP32-S2-MINI-1.43 ESP32-S2-MINI-1.44 PI.1 PI.7 PI.8 PI.10 PI.11 PI.12 PI.13 PI.15 PI.16 PI.17 PI.18 PI.19 PI.21 PI.22 PI.23 PI.24 PI.26 PI.27 PI.28 PI.29 PI.31 PI.32 PI.33 PI.35 PI.36 PI.37 PI.38 PI.40 STATUS.2 U1.7 U1.8 U1.9 U1.12 U1.24 VBUS. VBUS.A4B9 VBUS.A8 VBUS.B4A9 VBUS.B8 VBUS.SHELL

## Polygon pours and split planes (outlines as drawn)
GND on Top Layer (solid): 44.271,38.227 59.638,38.227 59.638,45.847 45.795,45.847 45.668,45.72 45.668,44.323 45.541,44.196 44.271,44.196
GND on Top Layer (solid): 44.271,38.227 44.398,38.354 44.398,58.039 44.525,57.912 59.892,57.912 59.892,38.354 59.638,38.1 57.987,38.1
GND on Bottom Layer (solid): 116.28,78.232 116.28,38.354 116.153,38.227 38.429,38.227 38.302,38.354 38.302,78.232
GND on Top Layer (solid): 38.302,58.547 60.019,58.547 60.019,38.354 60.146,38.227 38.302,38.227
+5V on Top Layer (solid): 38.302,78.232 38.302,58.674 60.019,58.674 60.146,58.801 60.146,38.227 116.153,38.227 116.28,38.1 116.28,78.105 116.153,78.232

## Silkscreen, mask and mechanical layers (free items; w line width, h text height)
Top Overlay:
  text "GND TX RX 3v3" at 74.37,75.938 h1 r180
  text "PI ZERO" at 79.704,68.064 h1 r180
  text "<->" at 102.945,61.853 h0.5
  text "GND" at 86.054,40.394 h1
  text "GND" at 99.77,40.394 h1
  text "GND 5V" at 103.453,40.267 h1
Bottom Overlay:
  circle w0.254: c41.096,62.992 r1.7
  circle w0.254: c113.359,62.992 r1.7
  text "+" at 110.901,60.788 h3 r315
  text "-" at 39.699,60.349 h3

## Text inside footprints (layer, text, board x,y; h text height)
B1: Bottom Overlay "+" at 96.55,46.945 h3 r315; Bottom Overlay "-" at 54.177,46.506 h3
PI: Top Overlay "5V" at 102.945,62.103 h1.27